# Altium PCB Creating Classes from Schematic with CM.PcbDoc
Units mm, origin at the board's own origin, x right, y up, seen from the top; angles counter-clockwise.
Board outline 150 x 100 mm, 4 copper layers (Top Layer, L2, L3, Bottom Layer), stack 1.337 mm thick; 12 components, 7 nets, 21 pads, 0 vias.
Unrouted connection lines stored in the file: 8.
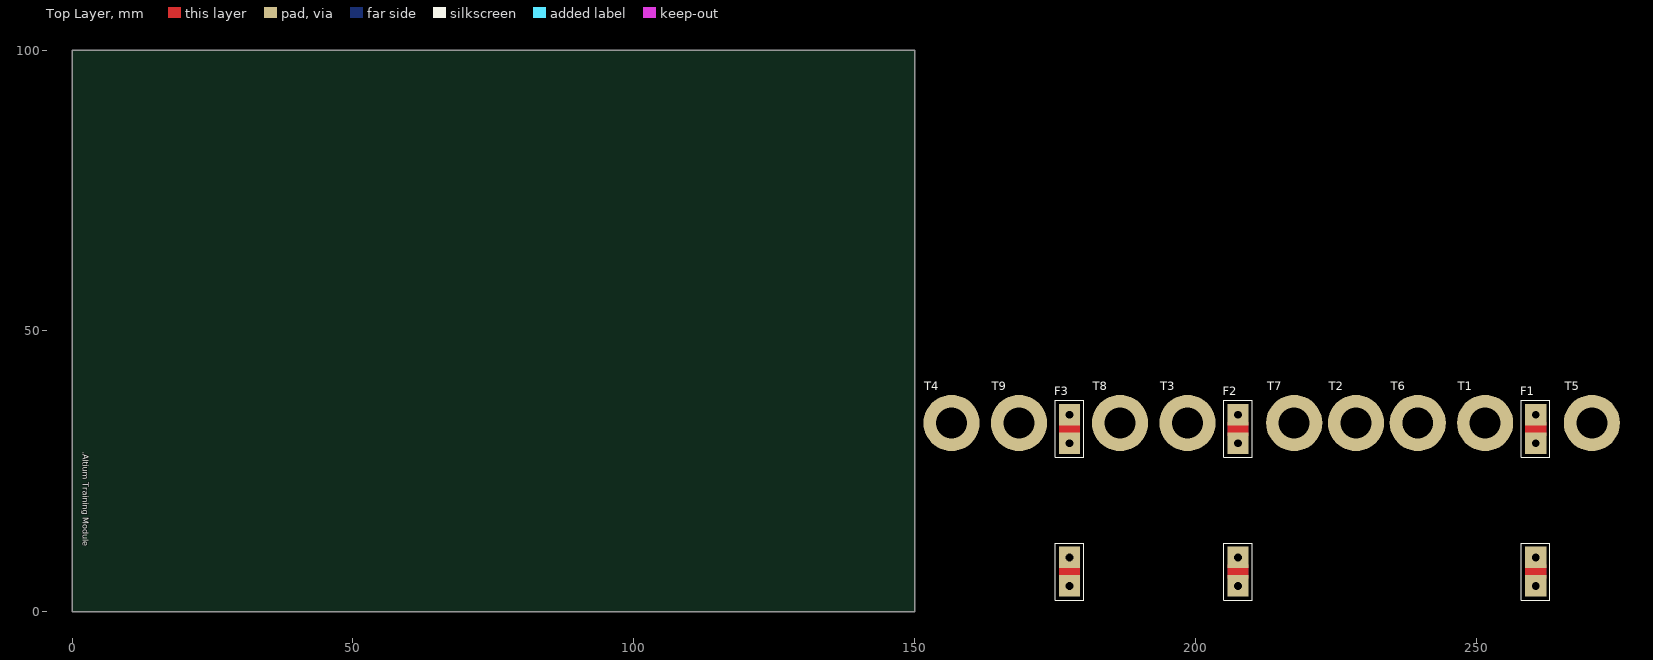
[diagram p0: Top Layer view]
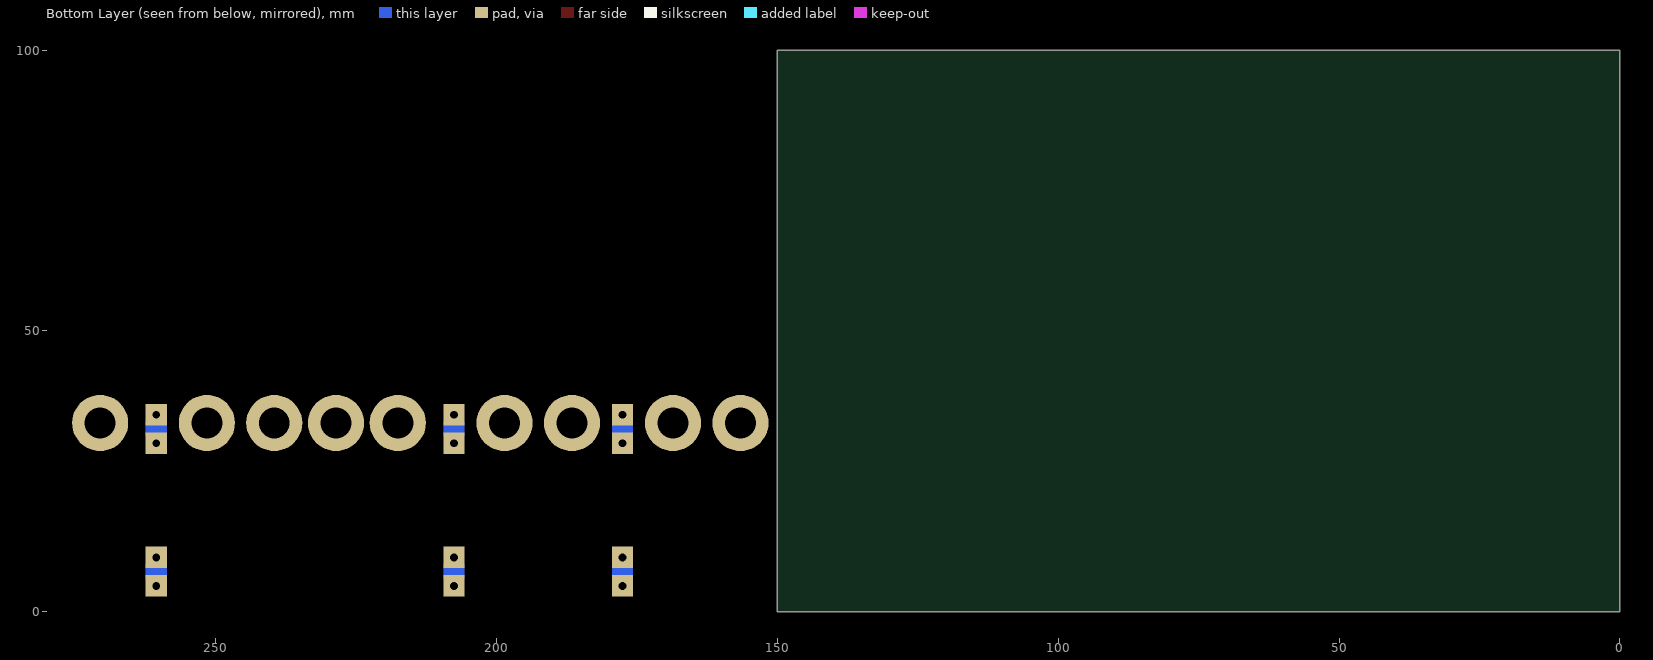
[diagram p1: Bottom Layer view, seen from below]

## Layer stack, top to bottom
Top Solder: solder mask 0.0102, Solder Resist, Dk 3.5
Top Layer: signal copper 0.0356
Dielectric 1: core 0.6096, Core-038, Dk 4.6
L2: signal copper 0.036
Dielectric 3: prepreg 0.0762, PP-007, Dk 4.2
L3: signal copper 0.036
Dielectric 2: core 0.508, Core-036, Dk 4.6
Bottom Layer: signal copper 0.0356
Bottom Solder: solder mask 0.0102, Solder Resist, Dk 3.5

## Board outline
0,0 150,0 150,100 0,100

## Design rules (kind name [scope] priority, off if disabled: settings)
AssemblyTestPointUsage [All] p1: isadvanced=TRUE
AssemblyTestpoint [All] p1: isadvanced=TRUE testpointundercomponent=TRUE minsize=1.016 maxsize=2.54 preferedsize=1.524 minholesize=0 maxholesize=1.016 preferedholesize=0.813 testpointgrid=0.025 usegrid=TRUE gridtolerance=0 allowsidetop=TRUE allowsidebottom=TRUE
Clearance Clearance_1 [(ExistsOnLayer('L2') Or ExistsOnLayer('L3')) vs (ExistsOnLayer('L2') Or ExistsOnLayer('L3'))] p1: gap=0.254 ignorepadtopadclearanceinfootprint=FALSE except(0: Arc-Hole Track-Hole SMDPad-Hole THPad-Hole Via-Hole Fill-Hole Poly-Hole Region-Hole Text-Hole) sourcerule=43 cellrowname=All cellrowtype=0 cellcolname=All cellcoltype=0 innerlayers=TRUE
Clearance Clearance_2 [(ExistsOnLayer('Top Layer') Or ExistsOnLayer('Bottom Layer')) vs (ExistsOnLayer('Top Layer') Or ExistsOnLayer('Bottom Layer'))] p2: gap=0.254 ignorepadtopadclearanceinfootprint=FALSE except(0: Arc-Hole Track-Hole SMDPad-Hole THPad-Hole Via-Hole Fill-Hole Poly-Hole Region-Hole Text-Hole) sourcerule=43 cellrowname=All cellrowtype=0 cellcolname=All cellcoltype=0 outerlayers=TRUE
Clearance [All] p3: gap=0.254 ignorepadtopadclearanceinfootprint=FALSE except(0: Arc-Hole Track-Hole SMDPad-Hole THPad-Hole Via-Hole Fill-Hole Poly-Hole Region-Hole Text-Hole) ismatrix=TRUE
ComponentClearance [All] p1: isadvanced=TRUE gap=0.254 collisioncheckmode=3 verticalgap=0.254 showdistances=FALSE
FabricationTestPointUsage [All] p1: isadvanced=TRUE valid=0 allowmultiple=FALSE
FabricationTestpoint [All] p1: isadvanced=TRUE side=3 testpointundercomponent=TRUE minsize=1.016 maxsize=2.54 preferedsize=1.524 minholesize=0 maxholesize=1.016 preferedholesize=0.813 testpointgrid=0.025 allowsidetop=TRUE allowsidebottom=TRUE usegrid=TRUE gridtolerance=0
FanoutControl Fanout_BGA [IsBGA] p1: isadvanced=TRUE bgadir=Out bgaviamode=Centered fanoutstyle=Auto fanoutdirection=Alternating viagrid=0.025 // Fanout_BGA (Default Rule)
FanoutControl Fanout_LCC [IsLCC] p2: isadvanced=TRUE bgadir=Out bgaviamode=Centered fanoutstyle=Auto fanoutdirection=Alternating viagrid=0.025 // Fanout_LCC (Default Rule)
FanoutControl Fanout_SOIC [IsSOIC] p3: isadvanced=TRUE bgadir=Out bgaviamode=Centered fanoutstyle=Auto fanoutdirection=Alternating viagrid=0.025 // Fanout_SOIC (Default Rule)
FanoutControl Fanout_Small [(CompPinCount < 5)] p4: isadvanced=TRUE bgadir=Out bgaviamode=Centered fanoutstyle=Auto fanoutdirection=OutThenIn viagrid=0.025 // Fanout_Small (Default Rule)
FanoutControl Fanout_Default [All] p5: isadvanced=TRUE bgadir=Out bgaviamode=Centered fanoutstyle=Auto fanoutdirection=Alternating viagrid=0.025 // Fanout_Default (Default Rule)
Height [All] p1: isadvanced=TRUE minheight=0 maxheight=25.4 prefheight=12.7
HoleSize "MaxMinHoleSize Screw Terminal" [(InComponentClass('LEFT') OR InComponentClass('RIGHT'))] p1: isadvanced=TRUE absolutevalues=TRUE maxlimit=5.5 minlimit=0.025 maxpercent=80.000 minpercent=20.000
HoleSize [All] p2: isadvanced=TRUE absolutevalues=TRUE maxlimit=2.54 minlimit=0.025 maxpercent=80.000 minpercent=20.000
HoleToHoleClearance [All] p1: isadvanced=TRUE gap=0.254 allowstackedmicrovias=TRUE
LayerPairs [All] p1: isadvanced=TRUE enforce=TRUE
MinimumSolderMaskSliver [All] p1: isadvanced=TRUE minsoldermaskwidth=0.254
NetAntennae [All] p1: isadvanced=TRUE netantennaetolerance=0
PasteMaskExpansion [All] p1: isadvanced=TRUE expansion=0
PlaneClearance [All] p1: isadvanced=TRUE clearance=0.508
PlaneConnect [All] p1: isadvanced=TRUE planeconnectstyle=Relief reliefexpansion=0.508 reliefentries=4 reliefconductorwidth=0.254 reliefairgap=0.254
PolygonConnect [All] p1: connectstyle=Relief reliefconductorwidth=0.254 reliefentries=4 polygonreliefangle="90 Angle" airgapwidth=0.254
RoutingCorners [All] p1: isadvanced=TRUE cornerstyle=45-Degree minsetback=2.54 maxsetback=2.54
RoutingPriority [All] p1: isadvanced=TRUE routingpriority=0
RoutingVias [All] p1: holewidth=0.711 width=1.27 viastyle="Through Hole" minholewidth=0.711 minwidth=1.27 maxholewidth=0.711 maxwidth=1.27
ShortCircuit [All] p1: isadvanced=TRUE allowed=FALSE
SilkToSilkClearance [All] p1: isadvanced=TRUE silktosilkclearance=0.254
SilkToSolderMaskClearance [IsPad] p1: isadvanced=TRUE minsilkscreentomaskgap=0.254 clearancetoexposedcopper=TRUE
SolderMaskExpansion [All] p1: isadvanced=TRUE expansion=0.102 istentingtop=FALSE
UnRoutedNet [All] p1: isadvanced=TRUE
UnpouredPolygon [All] p1: isadvanced=TRUE
Width MaxMinWidth_1 [InNet('NetF1_1')] p1: maxlimit=4 minlimit=4 preferedwidth=4 minimp=50.000000 maximp=50.000000 favimp=50.000000
Width MaxMinWidth_2 [InNetClass('AMP_10')] p2: maxlimit=4 minlimit=4 preferedwidth=4 minimp=50.000000 maximp=50.000000 favimp=50.000000
Width MaxMinWidth_3 [InNetClass('AMP_20')] p3: maxlimit=10 minlimit=10 preferedwidth=10 minimp=50.000000 maximp=50.000000 favimp=50.000000
Width MaxMinWidth_4 [InNetClass('AMP_30')] p4: maxlimit=20 minlimit=20 preferedwidth=20 minimp=50.000000 maximp=50.000000 favimp=50.000000
Width MaxMinWidth_5 [InNetClass('VOLTAGE_240')] p5: maxlimit=0.254 minlimit=0.254 preferedwidth=0.254
Width MaxMinWidth_6 [InNetClass('VOLTAGE_120')] p6: maxlimit=0.254 minlimit=0.254 preferedwidth=0.254
Width [All] p7: maxlimit=0.254 minlimit=0.254 preferedwidth=0.254
4 further rules are at their usual default settings.

## Classes and differential pairs
net class VOLTAGE_240: NetF2_1 NetF2_2 NetF3_2 NetT4_1
net class VOLTAGE_120: NetF1_1 NetF1_2 NetT2_1
net class AMP_30: NetF2_1 NetT4_1
net class AMP_20: NetF3_2
net class AMP_10: NetF1_1 NetF1_2 NetF2_2 NetT2_1
component class RIGHT: T5 T6 T7 T8 T9
component class LEFT: T1 T2 T3 T4
component class 240_VOLT: F2 F3
component class 120_VOLT: F1

## Components (designator, comment, footprint, x,y, rotation, side; value= is the part's Value field where it differs from the comment)
F1 "10 AMP 250 VAC FUSE" FUSE 260.6,4.6 r90 top
F2 "10 AMP 600 VAC FUSE" FUSE 207.6,4.6 r90 top
F3 "20 AMP 600 VAC FUSE" FUSE 177.6,4.6 r90 top
T1 "SCREW TERMINAL M5" "SCREW TERMINAL M5-Footprint" 251.6,33.6 r0 top
T2 "SCREW TERMINAL M5" "SCREW TERMINAL M5-Footprint" 228.6,33.6 r0 top
T3 "SCREW TERMINAL M5" "SCREW TERMINAL M5-Footprint" 198.6,33.6 r0 top
T4 "SCREW TERMINAL M5" "SCREW TERMINAL M5-Footprint" 156.6,33.6 r0 top
T5 "SCREW TERMINAL M5" "SCREW TERMINAL M5-Footprint" 270.6,33.6 r0 top
T6 "SCREW TERMINAL M5" "SCREW TERMINAL M5-Footprint" 239.6,33.6 r0 top
T7 "SCREW TERMINAL M5" "SCREW TERMINAL M5-Footprint" 217.6,33.6 r0 top
T8 "SCREW TERMINAL M5" "SCREW TERMINAL M5-Footprint" 186.6,33.6 r0 top
T9 "SCREW TERMINAL M5" "SCREW TERMINAL M5-Footprint" 168.6,33.6 r0 top

## Footprints (in the part's own frame and the unit in brackets; to place one, negate y for a bottom-side part, rotate by r counter-clockwise, add the part's x,y. Pads: shape width x height; smd on the part's side, far side on the other; paste and mask are expansions set on the pad)
FUSE [mil]
  rect 150x150 hole 55: 1(0,0) 1(200,0) 2(1000,0) 2(1200,0)
  Top Layer region: 1150,75 1050,75 1050,-75 1150,-75
  Top Layer region: 150,75 50,75 50,-75 150,-75
  Bottom Layer region: 1150,75 1050,75 1050,-75 1150,-75
  Bottom Layer region: 150,75 50,75 50,-75 150,-75
  silkscreen extent -100,-100 1300,100, body extent -8,-116 1208,116, height 348
"SCREW TERMINAL M5-Footprint" [mm] "SCREW TERMINAL M5-Footprint"
  round 10 hole 5.5: 1(0,0)

## Part data
F1: library part CMP-005-00017-2, Case/Package=THT, Current Rating=10A, Voltage Rating=250V, ClassName=120_VOLT, Mounting Technology=THT, Pins=2
F2: library part CMP-005-00018-1, Case/Package=THT, Current Rating=10A, Voltage Rating=600V, ClassName=240_VOLT, Mounting Technology=THT, Pins=2
F3: library part CMP-005-00019-1, Case/Package=THT, Current Rating=20A, Voltage Rating=600V, ClassName=240_VOLT, Mounting Technology=THT, Pins=2
T1 T2 T3 T4 T5 T6 T7 T8 T9: library part CMP-002-00077-1, Case/Package=THT, Max Current Rating=100A, Voltage Rating=600V, Connector Type="SCREW TERMINAL M5", Mounting Technology=THT, Pins=1
  T1 T2 T3 T4: ClassName=LEFT
  T5 T6 T7 T8 T9: ClassName=RIGHT

## Nets (pads, with @x,y where several pads share a name; then routed paths per layer and width w, separated by ;. In a path a pad name is that pad's centre, name@x,y a point inside that pad or via, vN(x,y) a via of type N, cw(c..) or ccw(c..) an arc to the next point about the centre after c; other vN are vias at no path point)
NetF1_1: F1.1 T1.1
NetF1_2: F1.2 T5.1
NetF2_1: F2.1 F3.1 T3.1
NetF2_2: F2.2 T7.1
NetF3_2: F3.2 T8.1
NetT2_1: T2.1 T6.1
NetT4_1: T4.1 T9.1

## Silkscreen, mask and mechanical layers (free items; w line width, h text height)
Top Overlay:
  text ".Altium Training Module" at 1.905,28.509 h1.02 r270
21_TITLE_BLOCK:
  drawing of 113 lines, arcs and shapes, not listed
  text "DWG. NO." at 156.339,157.861 h0.76
  text "REV:" at 181.993,157.861 h0.76
  text "6" at -102.074,156.718 h1.78
  text "5" at -38.684,156.718 h1.78
  text "4" at 24.545,156.718 h1.78
  text "3" at 88.214,156.718 h1.78
  text "2" at 151.689,156.718 h1.78
  text "1" at 215.316,156.718 h1.78
  text ".PCB_DWG_NO" at 161.798,155.575 h1.27
  text ".PCB_REV" at 182.372,155.575 h1.27
  text "T" at -127.965,153.101 h1.93
  text "H" at -126.864,153.101 h1.93
  text "I" at -125.594,153.101 h1.93
  text "S" at -125.086,153.101 h1.93
  text "D" at -123.434,153.101 h1.93
  text "O" at -122.164,153.101 h1.93
  text "C" at -120.767,153.101 h1.93
  text "U" at -119.496,153.101 h1.93
  text "M" at -118.226,153.101 h1.93
  text "E" at -116.744,153.101 h1.93
  text "N" at -115.558,153.101 h1.93
  text "T" at -114.331,153.101 h1.93
  text "A" at -112.721,153.101 h1.93
  text "N" at -111.536,153.101 h1.93
  text "D" at -110.266,153.101 h1.93
  text "T" at -108.529,153.101 h1.93
  text "H" at -107.428,153.101 h1.93
  text "E" at -106.158,153.101 h1.93
  text "D" at -104.507,153.101 h1.93
  text "A" at -103.236,153.101 h1.93
  text "T" at -102.051,153.101 h1.93
  text "A" at -100.992,153.101 h1.93
  text "D" at -99.298,153.101 h1.93
  text "I" at -98.028,153.101 h1.93
  text "S" at -97.562,153.101 h1.93
  text "C" at -96.377,153.101 h1.93
  text "L" at -95.106,153.101 h1.93
  text "O" at -94.133,153.101 h1.93
  text "S" at -92.735,153.101 h1.93
  text "E" at -91.55,153.101 h1.93
  text "D" at -90.364,153.101 h1.93
  text "H" at -88.628,153.101 h1.93
  text "E" at -87.358,153.101 h1.93
  text "R" at -86.172,153.101 h1.93
  text "E" at -84.944,153.101 h1.93
  text "I" at -83.758,153.101 h1.93
  text "N" at -83.25,153.101 h1.93
  text "O" at -81.514,153.101 h1.93
  text "R" at -80.117,153.101 h1.93
  text "REVISIONS" at 187.706,152.273 h1.52
  text "H" at -127.965,151.069 h1.93
  text "E" at -126.695,151.069 h1.93
  text "R" at -125.509,151.069 h1.93
  text "E" at -124.239,151.069 h1.93
  text "W" at -123.096,151.069 h1.93
  text "I" at -121.36,151.069 h1.93
  text "T" at -120.894,151.069 h1.93
  text "H" at -119.793,151.069 h1.93
  text "I" at -118.057,151.069 h1.93
  text "S" at -117.549,151.069 h1.93
  text "T" at -115.897,151.069 h1.93
  text "H" at -114.796,151.069 h1.93
  text "E" at -113.526,151.069 h1.93
  text "P" at -111.875,151.069 h1.93
  text "R" at -110.689,151.069 h1.93
  text "O" at -109.419,151.069 h1.93
  text "P" at -108.046,151.069 h1.93
  text "E" at -106.86,151.069 h1.93
  text "R" at -105.675,151.069 h1.93
  text "T" at -104.447,151.069 h1.93
  text "Y" at -103.346,151.069 h1.93
  text "O" at -101.694,151.069 h1.93
  text "F" at -100.339,151.069 h1.93
  text "A" at -98.73,151.069 h1.93
  text "L" at -97.545,151.069 h1.93
  text "T" at -96.613,151.069 h1.93
  text "I" at -95.512,151.069 h1.93
  text "U" at -95.004,151.069 h1.93
  text "M" at -93.734,151.069 h1.93
  text "L" at -91.786,151.069 h1.93
  text "I" at -90.812,151.069 h1.93
  text "M" at -90.304,151.069 h1.93
  text "I" at -88.864,151.069 h1.93
  text "T" at -88.356,151.069 h1.93
  text "E" at -87.255,151.069 h1.93
  text "D" at -86.069,151.069 h1.93
  text "A" at -84.333,151.069 h1.93
  text "N" at -83.148,151.069 h1.93
  text "D" at -81.877,151.069 h1.93
  text "M" at -80.099,151.069 h1.93
  text "A" at -78.617,151.069 h1.93
  text "Y" at -77.474,151.069 h1.93
  text "ZONE" at 147.447,149.098 h1.52
  text "REV" at 155.829,149.098 h1.52
  text "DATE" at 217.297,149.098 h1.52
  text "B" at -127.965,149.036 h1.93
  text "E" at -126.78,149.036 h1.93
  text "F" at -125.086,149.036 h1.93
  text "R" at -123.985,149.036 h1.93
  text "E" at -122.715,149.036 h1.93
  text "E" at -121.571,149.036 h1.93
  text "L" at -120.386,149.036 h1.93
  text "Y" at -119.412,149.036 h1.93
  text "D" at -117.718,149.036 h1.93
  text "I" at -116.448,149.036 h1.93
  text "S" at -115.982,149.036 h1.93
  text "T" at -114.796,149.036 h1.93
  text "R" at -113.713,149.036 h1.93
  text "I" at -112.485,149.036 h1.93
  text "B" at -111.977,149.036 h1.93
  text "U" at -110.791,149.036 h1.93
  text "T" at -109.521,149.036 h1.93
  text "E" at -108.42,149.036 h1.93
  text "D" at -107.234,149.036 h1.93
  text "I" at -105.498,149.036 h1.93
  text "N" at -104.99,149.036 h1.93
  text "W" at -103.296,149.036 h1.93
  text "H" at -101.56,149.036 h1.93
  text "O" at -100.332,149.036 h1.93
  text "L" at -98.935,149.036 h1.93
  text "E" at -97.961,149.036 h1.93
  text "." at -96.775,149.036 h1.93
  text "N" at -95.802,149.036 h1.93
  text "O" at -94.531,149.036 h1.93
  text "R" at -92.626,149.036 h1.93
  text "I" at -91.398,149.036 h1.93
  text "G" at -90.89,149.036 h1.93
  text "H" at -89.492,149.036 h1.93
  text "T" at -88.264,149.036 h1.93
  text "S" at -87.163,149.036 h1.93
  text "A" at -85.512,149.036 h1.93
  text "R" at -84.326,149.036 h1.93
  text "E" at -83.056,149.036 h1.93
  text "DESCRIPTION" at 181.61,148.971 h1.52
  text "APPROVED" at 230.124,148.971 h1.52
  text "R" at -127.965,147.004 h1.93
  text "E" at -126.695,147.004 h1.93
  text "S" at -125.509,147.004 h1.93
  text "E" at -124.324,147.004 h1.93
  text "R" at -123.138,147.004 h1.93
  text "V" at -121.868,147.004 h1.93
  text "E" at -120.682,147.004 h1.93
  text "D" at -119.496,147.004 h1.93
  text "O" at -117.76,147.004 h1.93
  text "R" at -116.363,147.004 h1.93
  text "E" at -114.585,147.004 h1.93
  text "X" at -113.399,147.004 h1.93
  text "P" at -112.256,147.004 h1.93
  text "R" at -111.07,147.004 h1.93
  text "E" at -109.8,147.004 h1.93
  text "S" at -108.614,147.004 h1.93
  text "S" at -107.428,147.004 h1.93
  text "O" at -105.777,147.004 h1.93
  text "R" at -104.38,147.004 h1.93
  text "I" at -102.644,147.004 h1.93
  text "M" at -102.136,147.004 h1.93
  text "P" at -100.653,147.004 h1.93
  text "L" at -99.468,147.004 h1.93
  text "I" at -98.536,147.004 h1.93
  text "E" at -98.028,147.004 h1.93
  text "D" at -96.843,147.004 h1.93
  text "W" at -95.149,147.004 h1.93
  text "A" at -93.413,147.004 h1.93
  text "R" at -92.227,147.004 h1.93
  text "A" at -90.957,147.004 h1.93
  text "N" at -89.771,147.004 h1.93
  text "T" at -88.543,147.004 h1.93
  text "E" at -87.442,147.004 h1.93
  text "E" at -86.257,147.004 h1.93
  text "G" at -84.701,147.004 h1.93
  text "I" at -83.303,147.004 h1.93
  text "V" at -82.795,147.004 h1.93
  text "E" at -81.61,147.004 h1.93
  text "N" at -80.424,147.004 h1.93
  text "." at -79.196,147.004 h1.93
  text "A" at 156.591,145.669 h1.52
  text "ORIGINAL" at 183.515,145.669 h1.52
  text "D" at -131.445,127.686 h1.78
  text "D" at 244.475,127.686 h1.78
  text "C" at -131.445,67.234 h1.78
  text "C" at 244.475,67.234 h1.78
  text "B" at -131.445,6.909 h1.78
  text "B" at 244.475,6.909 h1.78
  text "DWG. NO." at 245.491,-8.257 h0.76 r270
  text ".PCB_DWG_NO" at 243.205,-13.716 h1.27 r270
  text "REV:" at 245.491,-33.911 h0.76 r270
  text ".PCB_REV" at 243.205,-34.29 h1.27 r270
  text "PART NO." at 91.44,-35.306 h1.14
  text ".PCB_PART_NUMBER" at 99.441,-35.306 h1.14
  text "UNLESS OTHERWISE SPECIFIED DIMENSIONS" at 91.948,-37.973 h1.14
  text "APPROVALS" at 134.01,-38.026 h1.14
  text "DATE" at 155.854,-38.026 h1.14
  text "2175 SALK AVENUE" at 212.217,-38.1 h1.14
  text "AND TOLERANCE ARE IN INCHES AND" at 93.345,-39.878 h1.14
  text "DESIGNER:" at 125.882,-40.058 h1.14
  text "SUITE 200" at 212.217,-40.386 h1.14
  text "APPLY TO THE FINISHED PART" at 96.139,-41.656 h1.14
  text ".PCB_DESIGNER" at 134.01,-42.09 h1.52
  text ".PCB_DESIGNER_APP_DATE" at 152.552,-42.09 h1.02
  text "CARLSBAD, CA 92008" at 212.217,-42.672 h1.14
  text "TOLERANCE ON:" at 102.235,-44.831 h1.14
  text "USA" at 212.217,-44.958 h1.14
  text "ENGINEER:" at 125.882,-45.138 h1.14
  text ".PCB_ENGINEER_APP_DATE" at 152.552,-46.916 h1.02
  text "2 DEC. PLACE" at 91.948,-47.117 h1.02
  text "3 DEC. PLACE" at 103.505,-47.117 h1.02
  text "ANGLES" at 117.094,-47.117 h1.02
  text ".PCB_ENGINEER" at 134.01,-47.17 h1.52
  text "TITLE:" at 164.338,-47.625 h1.14
  text "CHECKER:" at 125.882,-50.218 h1.14
  text ".PCB_2_DEC_TOL" at 93.345,-51.054 h1.52
  text ".PCB_3_DEC_TOL" at 104.394,-51.054 h1.52
  text ".PCB_ANG_TOL" at 116.205,-51.054 h1.52
  text ".PCB_CHECKER_APP_DATE" at 152.502,-52.098 h1.02
  text ".PCB_CHECKER" at 134.01,-52.25 h1.52
  text "THIRD ANGLE PROJECTION" at 72.314,-52.58 h1.02
  text ".Pcb_File_Name_No_Path" at 166.243,-53.043 h2.54
  text "A" at -131.445,-53.289 h1.78
  text "A" at 244.475,-53.289 h1.78
  text "MATERIAL:" at 91.948,-54.689 h1.14
  text "REFERENCE DOCUMENTS" at 135.534,-55.806 h1.14
  text ".Altium Training Module" at 166.37,-57.15 h2.54
  text "BOM:" at 125.882,-58.346 h1.14
  text "SEE NOTES" at 101.244,-59.743 h1.52
  text ".DOC_NO_BOM" at 134.01,-60.632 h1.52
  text ".Altium Training" at 166.37,-62.23 h2.03
  text "ASSY DWG:" at 125.882,-63.172 h1.14
  text ".DOC_NO_ASSY_DWG" at 134.01,-65.458 h1.52
  text "SIZE:" at 165.862,-66.294 h1.14
  text "CAGE CODE:" at 172.085,-66.294 h1.14
  text "DWG NO:" at 197.485,-66.294 h1.14
  text "REV:" at 237.109,-66.294 h1.14
  text "FAB DWG:" at 125.882,-67.998 h1.14
  text ".PCB_DWG_NO" at 203.2,-69.85 h2.54
  text "B" at 166.878,-69.977 h2.54
  text ".DOC_NO_FAB_DWG" at 134.01,-70.157 h1.52
  text ".CAGE_CODE" at 176.403,-70.231 h2.54
  text ".PCB_REV" at 236.606,-70.527 h2.54
  text "SCHEMATIC:" at 125.882,-72.824 h1.14
  text "Modified DATE:" at 91.745,-72.85 h1.14
  text "SCALE:" at 164.338,-74.295 h1.14
  text "FILE NAME:" at 179.705,-74.297 h1.14
  text "SHEET:" at 223.901,-74.297 h1.14
  text ".ModifiedDate" at 106.68,-74.602 h1.52
  text ".Printout_Name" at -126.848,-74.854 h3.81
  text ".DOC_NO_SCH_DWG" at 134.01,-75.11 h1.52
  text ".PCB_FILE_NAME_NO_PATH" at 188.417,-75.44 h1.52
  text ".PCB_SCALE" at 171.196,-75.565 h1.52
  text "OF" at 235.331,-75.567 h1.14
  text "DOC-104 REV A" at -128.27,-77.269 h0.51
  text "6" at -102.074,-79.502 h1.78
  text "5" at -38.684,-79.502 h1.78
  text "4" at 24.545,-79.502 h1.78
  text "3" at 88.214,-79.502 h1.78
  text "2" at 151.689,-79.502 h1.78
  text "1" at 215.316,-79.502 h1.78
22_TITLE_BLOCK_MIRRORED:
  drawing of 113 lines, arcs and shapes, not listed
  text "REV:" at -67.693,157.861 h0.76
  text "DWG. NO." at -42.039,157.861 h0.76
  text "1" at -101.016,156.718 h1.78
  text "2" at -37.389,156.718 h1.78
  text "3" at 26.086,156.718 h1.78
  text "4" at 89.755,156.718 h1.78
  text "5" at 152.984,156.718 h1.78
  text "6" at 216.374,156.718 h1.78
  text ".PCB_REV" at -68.072,155.575 h1.27
  text ".PCB_DWG_NO" at -47.498,155.575 h1.27
  text "R" at 194.417,153.101 h1.93
  text "O" at 195.814,153.101 h1.93
  text "N" at 197.55,153.101 h1.93
  text "I" at 198.058,153.101 h1.93
  text "E" at 199.244,153.101 h1.93
  text "R" at 200.472,153.101 h1.93
  text "E" at 201.658,153.101 h1.93
  text "H" at 202.928,153.101 h1.93
  text "D" at 204.664,153.101 h1.93
  text "E" at 205.85,153.101 h1.93
  text "S" at 207.035,153.101 h1.93
  text "O" at 208.433,153.101 h1.93
  text "L" at 209.406,153.101 h1.93
  text "C" at 210.677,153.101 h1.93
  text "S" at 211.862,153.101 h1.93
  text "I" at 212.328,153.101 h1.93
  text "D" at 213.598,153.101 h1.93
  text "A" at 215.292,153.101 h1.93
  text "T" at 216.351,153.101 h1.93
  text "A" at 217.536,153.101 h1.93
  text "D" at 218.807,153.101 h1.93
  text "E" at 220.458,153.101 h1.93
  text "H" at 221.728,153.101 h1.93
  text "T" at 222.829,153.101 h1.93
  text "D" at 224.565,153.101 h1.93
  text "N" at 225.836,153.101 h1.93
  text "A" at 227.021,153.101 h1.93
  text "T" at 228.631,153.101 h1.93
  text "N" at 229.858,153.101 h1.93
  text "E" at 231.044,153.101 h1.93
  text "M" at 232.526,153.101 h1.93
  text "U" at 233.796,153.101 h1.93
  text "C" at 235.067,153.101 h1.93
  text "O" at 236.464,153.101 h1.93
  text "D" at 237.734,153.101 h1.93
  text "S" at 239.386,153.101 h1.93
  text "I" at 239.894,153.101 h1.93
  text "H" at 241.164,153.101 h1.93
  text "T" at 242.265,153.101 h1.93
  text "REVISIONS" at -73.406,152.273 h1.52
  text "Y" at 191.774,151.069 h1.93
  text "A" at 192.917,151.069 h1.93
  text "M" at 194.399,151.069 h1.93
  text "D" at 196.177,151.069 h1.93
  text "N" at 197.448,151.069 h1.93
  text "A" at 198.633,151.069 h1.93
  text "D" at 200.369,151.069 h1.93
  text "E" at 201.555,151.069 h1.93
  text "T" at 202.656,151.069 h1.93
  text "I" at 203.164,151.069 h1.93
  text "M" at 204.604,151.069 h1.93
  text "I" at 205.112,151.069 h1.93
  text "L" at 206.086,151.069 h1.93
  text "M" at 208.034,151.069 h1.93
  text "U" at 209.304,151.069 h1.93
  text "I" at 209.812,151.069 h1.93
  text "T" at 210.913,151.069 h1.93
  text "L" at 211.845,151.069 h1.93
  text "A" at 213.03,151.069 h1.93
  text "F" at 214.639,151.069 h1.93
  text "O" at 215.994,151.069 h1.93
  text "Y" at 217.646,151.069 h1.93
  text "T" at 218.747,151.069 h1.93
  text "R" at 219.975,151.069 h1.93
  text "E" at 221.16,151.069 h1.93
  text "P" at 222.346,151.069 h1.93
  text "O" at 223.719,151.069 h1.93
  text "R" at 224.989,151.069 h1.93
  text "P" at 226.175,151.069 h1.93
  text "E" at 227.826,151.069 h1.93
  text "H" at 229.096,151.069 h1.93
  text "T" at 230.197,151.069 h1.93
  text "S" at 231.849,151.069 h1.93
  text "I" at 232.357,151.069 h1.93
  text "H" at 234.093,151.069 h1.93
  text "T" at 235.194,151.069 h1.93
  text "I" at 235.66,151.069 h1.93
  text "W" at 237.396,151.069 h1.93
  text "E" at 238.539,151.069 h1.93
  text "R" at 239.809,151.069 h1.93
  text "E" at 240.995,151.069 h1.93
  text "H" at 242.265,151.069 h1.93
  text "DATE" at -102.997,149.098 h1.52
  text "REV" at -41.529,149.098 h1.52
  text "ZONE" at -33.147,149.098 h1.52
  text "E" at 197.356,149.036 h1.93
  text "R" at 198.626,149.036 h1.93
  text "A" at 199.812,149.036 h1.93
  text "S" at 201.463,149.036 h1.93
  text "T" at 202.564,149.036 h1.93
  text "H" at 203.792,149.036 h1.93
  text "G" at 205.19,149.036 h1.93
  text "I" at 205.698,149.036 h1.93
  text "R" at 206.926,149.036 h1.93
  text "O" at 208.831,149.036 h1.93
  text "N" at 210.101,149.036 h1.93
  text "." at 211.075,149.036 h1.93
  text "E" at 212.261,149.036 h1.93
  text "L" at 213.235,149.036 h1.93
  text "O" at 214.632,149.036 h1.93
  text "H" at 215.86,149.036 h1.93
  text "W" at 217.596,149.036 h1.93
  text "N" at 219.29,149.036 h1.93
  text "I" at 219.798,149.036 h1.93
  text "D" at 221.534,149.036 h1.93
  text "E" at 222.72,149.036 h1.93
  text "T" at 223.821,149.036 h1.93
  text "U" at 225.091,149.036 h1.93
  text "B" at 226.277,149.036 h1.93
  text "I" at 226.785,149.036 h1.93
  text "R" at 228.013,149.036 h1.93
  text "T" at 229.096,149.036 h1.93
  text "S" at 230.282,149.036 h1.93
  text "I" at 230.748,149.036 h1.93
  text "D" at 232.018,149.036 h1.93
  text "Y" at 233.712,149.036 h1.93
  text "L" at 234.686,149.036 h1.93
  text "E" at 235.871,149.036 h1.93
  text "E" at 237.015,149.036 h1.93
  text "R" at 238.285,149.036 h1.93
  text "F" at 239.386,149.036 h1.93
  text "E" at 241.08,149.036 h1.93
  text "B" at 242.265,149.036 h1.93
  text "APPROVED" at -115.824,148.971 h1.52
  text "DESCRIPTION" at -67.31,148.971 h1.52
  text "." at 193.496,147.004 h1.93
  text "N" at 194.724,147.004 h1.93
  text "E" at 195.91,147.004 h1.93
  text "V" at 197.095,147.004 h1.93
  text "I" at 197.603,147.004 h1.93
  text "G" at 199.001,147.004 h1.93
  text "E" at 200.557,147.004 h1.93
  text "E" at 201.742,147.004 h1.93
  text "T" at 202.843,147.004 h1.93
  text "N" at 204.071,147.004 h1.93
  text "A" at 205.257,147.004 h1.93
  text "R" at 206.527,147.004 h1.93
  text "A" at 207.713,147.004 h1.93
  text "W" at 209.449,147.004 h1.93
  text "D" at 211.143,147.004 h1.93
  text "E" at 212.328,147.004 h1.93
  text "I" at 212.836,147.004 h1.93
  text "L" at 213.768,147.004 h1.93
  text "P" at 214.953,147.004 h1.93
  text "M" at 216.436,147.004 h1.93
  text "I" at 216.944,147.004 h1.93
  text "R" at 218.68,147.004 h1.93
  text "O" at 220.077,147.004 h1.93
  text "S" at 221.728,147.004 h1.93
  text "S" at 222.914,147.004 h1.93
  text "E" at 224.1,147.004 h1.93
  text "R" at 225.37,147.004 h1.93
  text "P" at 226.556,147.004 h1.93
  text "X" at 227.699,147.004 h1.93
  text "E" at 228.885,147.004 h1.93
  text "R" at 230.663,147.004 h1.93
  text "O" at 232.06,147.004 h1.93
  text "D" at 233.796,147.004 h1.93
  text "E" at 234.982,147.004 h1.93
  text "V" at 236.168,147.004 h1.93
  text "R" at 237.438,147.004 h1.93
  text "E" at 238.624,147.004 h1.93
  text "S" at 239.809,147.004 h1.93
  text "E" at 240.995,147.004 h1.93
  text "R" at 242.265,147.004 h1.93
  text "ORIGINAL" at -69.215,145.669 h1.52
  text "A" at -42.291,145.669 h1.52
  text "D" at -130.175,127.686 h1.78
  text "D" at 245.745,127.686 h1.78
  text "C" at -130.175,67.234 h1.78
  text "C" at 245.745,67.234 h1.78
  text "B" at -130.175,6.909 h1.78
  text "B" at 245.745,6.909 h1.78
  text "DWG. NO." at -131.191,-8.257 h0.76 r90
  text ".PCB_DWG_NO" at -128.905,-13.716 h1.27 r90
  text "REV:" at -131.191,-33.911 h0.76 r90
  text ".PCB_REV" at -128.905,-34.29 h1.27 r90
  text ".PCB_PART_NUMBER" at 14.859,-35.306 h1.14
  text "PART NO." at 22.86,-35.306 h1.14
  text "UNLESS OTHERWISE SPECIFIED DIMENSIONS" at 22.352,-37.973 h1.14
  text "DATE" at -41.554,-38.026 h1.14
  text "APPROVALS" at -19.71,-38.026 h1.14
  text "2175 SALK AVENUE" at -97.917,-38.1 h1.14
  text "AND TOLERANCE ARE IN INCHES AND" at 20.955,-39.878 h1.14
  text "DESIGNER:" at -11.582,-40.058 h1.14
  text "SUITE 200" at -97.917,-40.386 h1.14
  text "APPLY TO THE FINISHED PART" at 18.161,-41.656 h1.14
  text ".PCB_DESIGNER_APP_DATE" at -38.303,-42.09 h1.02
  text ".PCB_DESIGNER" at -19.761,-42.09 h1.52
  text "CARLSBAD, CA 92008" at -97.917,-42.672 h1.14
  text "TOLERANCE ON:" at 12.065,-44.831 h1.14
  text "USA" at -97.917,-44.958 h1.14
  text "ENGINEER:" at -11.582,-45.138 h1.14
  text ".PCB_ENGINEER_APP_DATE" at -38.303,-46.916 h1.02
  text "ANGLES" at -2.794,-47.117 h1.02
  text "3 DEC. PLACE" at 10.795,-47.117 h1.02
  text "2 DEC. PLACE" at 22.352,-47.117 h1.02
  text ".PCB_ENGINEER" at -19.761,-47.17 h1.52
  text "TITLE:" at -50.038,-47.625 h1.14
  text "CHECKER:" at -11.582,-50.218 h1.14
  text ".PCB_ANG_TOL" at -1.905,-51.054 h1.52
  text ".PCB_3_DEC_TOL" at 9.906,-51.054 h1.52
  text ".PCB_2_DEC_TOL" at 20.955,-51.054 h1.52
  text ".Pcb_File_Name_No_Path" at -53.594,-52.07 h2.54
  text ".PCB_CHECKER_APP_DATE" at -38.252,-52.098 h1.02
  text ".PCB_CHECKER" at -19.761,-52.25 h1.52
  text "THIRD ANGLE PROJECTION" at 41.986,-52.58 h1.02
  text "A" at -130.175,-53.289 h1.78
  text "A" at 245.745,-53.289 h1.78
  text "MATERIAL:" at 22.352,-54.689 h1.14
  text "REFERENCE DOCUMENTS" at -21.234,-55.806 h1.14
  text ".Altium Training Module" at -53.594,-57.15 h2.54
  text "BOM:" at -11.582,-58.346 h1.14
  text "SEE NOTES" at 13.056,-59.743 h1.52
  text ".DOC_NO_BOM" at -19.71,-60.632 h1.52
  text ".Altium Training" at -53.594,-62.23 h2.03
  text "ASSY DWG:" at -11.582,-63.172 h1.14
  text ".DOC_NO_ASSY_DWG" at -19.71,-65.458 h1.52
  text "REV:" at -122.809,-66.294 h1.14
  text "DWG NO:" at -83.185,-66.294 h1.14
  text "CAGE CODE:" at -57.785,-66.294 h1.14
  text "SIZE:" at -51.562,-66.294 h1.14
  text "FAB DWG:" at -11.582,-67.998 h1.14
  text ".PCB_DWG_NO" at -88.9,-69.85 h2.54
  text "B" at -52.578,-69.977 h2.54
  text ".DOC_NO_FAB_DWG" at -19.71,-70.157 h1.52
  text ".CAGE_CODE" at -62.103,-70.231 h2.54
  text ".PCB_REV" at -122.306,-70.4 h2.54
  text "SCHEMATIC:" at -11.582,-72.824 h1.14
  text "PRINT DATE:" at 22.555,-72.85 h1.14
  text "SHEET:" at -109.601,-74.297 h1.14
  text "FILE NAME:" at -65.405,-74.297 h1.14
  text "SCALE:" at -50.038,-74.295 h1.14
  text ".PRINT_DATE" at 12.192,-74.602 h1.52
  text ".Printout_Name" at 241.148,-74.854 h3.81
  text ".DOC_NO_SCH_DWG" at -19.71,-75.11 h1.52
  text ".PCB_FILE_NAME_NO_PATH" at -74.117,-75.44 h1.52
  text "OF" at -121.031,-75.567 h1.14
  text ".PCB_SCALE" at -56.896,-75.565 h1.52
  text "DOC-104 REV A" at 242.57,-77.269 h0.51
  text "1" at -101.016,-79.502 h1.78
  text "2" at -37.389,-79.502 h1.78
  text "3" at 26.086,-79.502 h1.78
  text "4" at 89.755,-79.502 h1.78
  text "5" at 152.984,-79.502 h1.78
  text "6" at 216.374,-79.502 h1.78

## Dimensions
0,0 to 0,100 on 2_DIMENSION
0,0 to 150,0 on 2_DIMENSION